# Altium PCB ouch_area.PcbDoc
Units mm, origin at the board's own origin, x right, y up, seen from the top; angles counter-clockwise.
Board outline 240 x 480 mm, 2 copper layers (Top Layer, Bottom Layer); 10 components, 8 nets, 234 pads, 54 vias.
Unrouted connection lines stored in the file: 25.
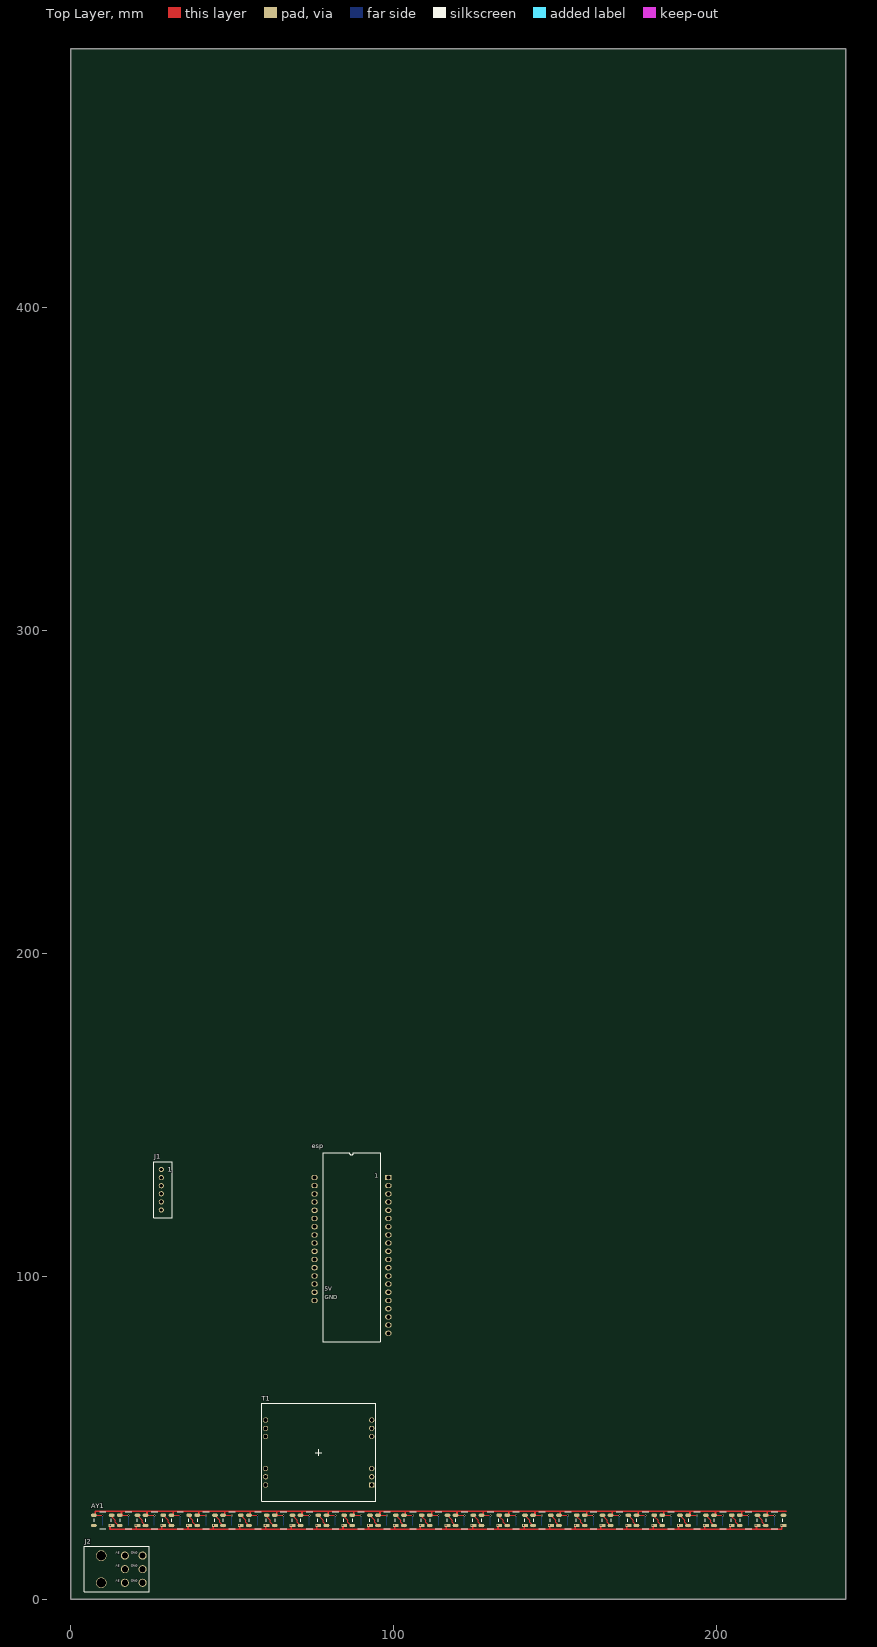
[diagram p0: Top Layer view]
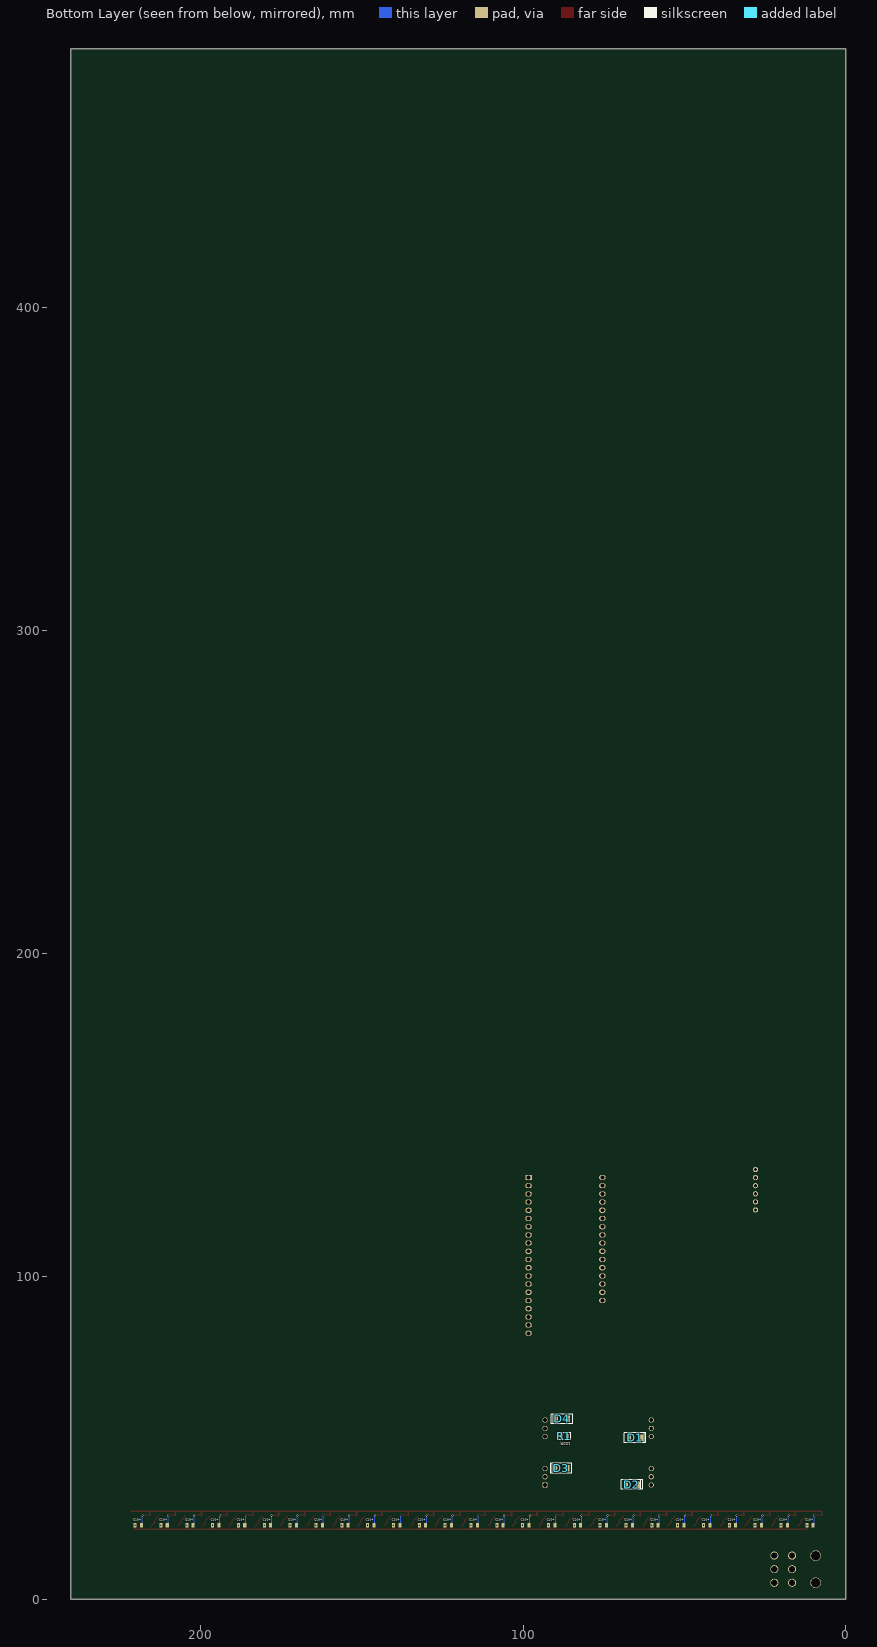
[diagram p1: Bottom Layer view, seen from below]

## Layer stack, top to bottom
Top Solder: solder mask 0.0102, Solder Resist, Dk 3.5
Top Layer: signal copper 0.0356
Dielectric 1: dielectric 0.32, FR-4, Dk 4.8
Bottom Layer: signal copper 0.0356
Bottom Solder: solder mask 0.0102, Solder Resist, Dk 3.5

## Board outline
0,0 240,0 240,480 0,480

## Design rules (kind name [scope] priority, off if disabled: settings)
Clearance [All] p1: gap=0.381 ignorepadtopadclearanceinfootprint=FALSE except(0.127: Arc-THPad Arc-Text Arc-Hole Track-THPad Track-Text Track-Hole SMDPad-SMDPad SMDPad-THPad SMDPad-Via SMDPad-Text SMDPad-Hole THPad-THPad THPad-Via THPad-Text THPad-Hole Via-Via Via-Text Via-Hole Fill-Text Fill-Hole Poly-Text Poly-Hole Region-Text Region-Hole Text-Text Text-Hole; 0.178: Arc-SMDPad Track-SMDPad; 0.229: Arc-Arc Arc-Track Track-Track; 0.254: Arc-Via Track-Via)
HoleSize [All] p1: absolutevalues=TRUE maxlimit=5 minlimit=0.025 maxpercent=80.000 minpercent=20.000
MinimumSolderMaskSliver [All] p1: minsoldermaskwidth=0
PolygonConnect [All] p1: connectstyle=Relief reliefconductorwidth=0.254 reliefentries=4 polygonreliefangle="90 Angle" airgapwidth=0.254
RoutingVias [All] p1: holewidth=0.3 width=0.5 viastyle="Through Hole" minholewidth=0.3 minwidth=0.5 maxholewidth=1.2 maxwidth=2
SilkToSilkClearance [All] p1: silktosilkclearance=0.127
SilkToSolderMaskClearance [IsPad] p1: minsilkscreentomaskgap=0.127 clearancetoexposedcopper=TRUE
SolderMaskExpansion [All] p1: expansion=0.102
Width [All] p1: maxlimit=2.54 minlimit=0.127 preferedwidth=0.254
26 further rules are at their usual default settings.

## Components (designator, comment, footprint, x,y, rotation, side; value= is the part's Value field where it differs from the comment)
AY1 "Ws2812_27leds" 27xWs2812B_withC 217.865,24.384 r180 top
D1 "LL4148" SOD80-LL4148 65.296,49.944 r0 bottom
D2 "LL4148" SOD80-LL4148 66.312,35.466 r0 bottom
D3 "LL4148" SOD80-LL4148 88.156,40.546 r180 bottom
D4 "LL4148" SOD80-LL4148 87.902,55.786 r180 bottom
esp "processor" ESP_32_socket 98.298,130.556 r0 top
J1 "ouch_and_mainboard_connector" "xh2.54 6pin" 28,133 r0 top
J2 "4.2mm_5v_gnd_3x3" 4.2MM_6pin_all_5 16.698,5.062 r180 top
R1 "102R" R0805 87.181,50.452 r0 bottom
T1 "Touch_pads2x2" TOUCHBOARD2X2 76.726,45.372 r180 top

## Footprints (in the part's own frame and the unit in brackets; to place one, negate y for a bottom-side part, rotate by r counter-clockwise, add the part's x,y. Pads: shape width x height; smd on the part's side, far side on the other; paste and mask are expansions set on the pad)
4.2MM_6pin_all_5 [mm]
  round 2.5 hole 1.9: 1(-5.5,0) 2(-5.5,-4.2) 3(-5.5,-8.4) 4(0,-8.4) 5(0,-4.2) 6(0,0)
  round 3.3 hole 3 unplated: 98(7.3,-8.4) 99(7.3,0)
  silkscreen extent -7.5,-11.25 12.5,2.75
27xWs2812B_withC [mm]
  rect 0.95x1.45 smd far side: 1(-0.295,1.524) 1(7.705,1.524) 1(15.705,1.524) 1(23.705,1.524) 1(31.705,1.524) 1(39.705,1.524) 1(47.705,1.524) 1(55.705,1.524) 1(63.705,1.524) 1(71.705,1.524) 1(79.705,1.524) 1(87.705,1.524) 1(95.705,1.524) 1(103.705,1.524) 1(111.705,1.524) 1(119.705,1.524) 1(127.705,1.524) 1(135.705,1.524) 1(143.705,1.524) 1(151.705,1.524) 1(159.705,1.524) 1(167.705,1.524) 1(175.705,1.524) 1(183.705,1.524) 1(191.705,1.524) 1(199.705,1.524) 1(207.705,1.524) 3(-2.245,1.524) 3(5.755,1.524) 3(13.755,1.524) 3(21.755,1.524) 3(29.755,1.524) 3(37.755,1.524) 3(45.755,1.524) 3(53.755,1.524) 3(61.755,1.524) 3(69.755,1.524) 3(77.755,1.524) 3(85.755,1.524) 3(93.755,1.524) 3(101.755,1.524) 3(109.755,1.524) 3(117.755,1.524) 3(125.755,1.524) 3(133.755,1.524) 3(141.755,1.524) 3(149.755,1.524) 3(157.755,1.524) 3(165.755,1.524) 3(173.755,1.524) 3(181.755,1.524) 3(189.755,1.524) 3(197.755,1.524) 3(205.755,1.524)
  oval 1.8x1 smd: 1(2.75,-1.6) 1(10.75,-1.6) 1(18.75,-1.6) 1(26.75,-1.6) 1(34.75,-1.6) 1(42.75,-1.6) 1(50.75,-1.6) 1(58.75,-1.6) 1(66.75,-1.6) 1(74.75,-1.6) 1(82.75,-1.6) 1(90.75,-1.6) 1(98.75,-1.6) 1(106.75,-1.6) 1(114.75,-1.6) 1(122.75,-1.6) 1(130.75,-1.6) 1(138.75,-1.6) 1(146.75,-1.6) 1(154.75,-1.6) 1(162.75,-1.6) 1(170.75,-1.6) 1(178.75,-1.6) 1(186.75,-1.6) 1(194.75,-1.6) 1(202.75,-1.6) 1(210.75,-1.6) 4(-2.75,-1.6) 4(210.75,1.6) 5(2.75,1.6) 5(5.25,-1.6) 5(10.75,1.6) 5(13.25,-1.6) 5(18.75,1.6) 5(21.25,-1.6) 5(26.75,1.6) 5(29.25,-1.6) 5(34.75,1.6) 5(37.25,-1.6) 5(42.75,1.6) 5(45.25,-1.6) 5(50.75,1.6) 5(53.25,-1.6) 5(58.75,1.6) 5(61.25,-1.6) 5(66.75,1.6) 5(69.25,-1.6) 5(74.75,1.6) 5(77.25,-1.6) 5(82.75,1.6) 5(85.25,-1.6) 5(90.75,1.6) 5(93.25,-1.6) 5(98.75,1.6) 5(101.25,-1.6) 5(106.75,1.6) 5(109.25,-1.6) 5(114.75,1.6) 5(117.25,-1.6) 5(122.75,1.6) 5(125.25,-1.6) 5(130.75,1.6) 5(133.25,-1.6) 5(138.75,1.6) 5(141.25,-1.6) 5(146.75,1.6) 5(149.25,-1.6) 5(154.75,1.6) 5(157.25,-1.6) 5(162.75,1.6) 5(165.25,-1.6) 5(170.75,1.6) 5(173.25,-1.6) 5(178.75,1.6) 5(181.25,-1.6) 5(186.75,1.6) 5(189.25,-1.6) 5(194.75,1.6) 5(197.25,-1.6) 5(202.75,1.6) 5(205.25,-1.6)
  rect 1.8x1 smd: 3(-2.75,1.6) 3(5.25,1.6) 3(13.25,1.6) 3(21.25,1.6) 3(29.25,1.6) 3(37.25,1.6) 3(45.25,1.6) 3(53.25,1.6) 3(61.25,1.6) 3(69.25,1.6) 3(77.25,1.6) 3(85.25,1.6) 3(93.25,1.6) 3(101.25,1.6) 3(109.25,1.6) 3(117.25,1.6) 3(125.25,1.6) 3(133.25,1.6) 3(141.25,1.6) 3(149.25,1.6) 3(157.25,1.6) 3(165.25,1.6) 3(173.25,1.6) 3(181.25,1.6) 3(189.25,1.6) 3(197.25,1.6) 3(205.25,1.6)
  Top Layer lines w0.254: 210.54,-1.524 208,-1.524 ; 205.335,-1.27 204.065,0 204.065,0.635 202.795,1.905 ; 202.54,-1.524 200,-1.524 ; 197.08,-1.27 195.81,0 195.81,0.635 194.54,1.905 ; 194.54,-1.524 192,-1.524 ; 188.955,-1.27 187.685,0 187.685,0.635 186.415,1.905 ; 186.54,-1.524 184,-1.524 ; 181.335,-1.27 180.065,0 180.065,0.635 178.795,1.905 ; 178.54,-1.524 176,-1.524 ; 173.08,-1.27 171.81,0 171.81,0.635 170.54,1.905 ; 170.54,-1.524 168,-1.524 ; 164.955,-1.27 163.685,0 163.685,0.635 162.415,1.905 ; 162.54,-1.524 160,-1.524 ; 157.335,-1.27 156.065,0 156.065,0.635 154.795,1.905 ; 154.54,-1.524 152,-1.524 ; 149.08,-1.27 147.81,0 147.81,0.635 146.54,1.905 ; 146.54,-1.524 144,-1.524 ; 140.955,-1.27 139.685,0 139.685,0.635 138.415,1.905 ; 138.54,-1.524 136,-1.524 ; 133.335,-1.27 132.065,0 132.065,0.635 130.795,1.905 ; 130.54,-1.524 128,-1.524 ; 125.08,-1.27 123.81,0 123.81,0.635 122.54,1.905 ; 122.54,-1.524 120,-1.524 ; 116.955,-1.27 115.685,0 115.685,0.635 114.415,1.905 ; 114.54,-1.524 112,-1.524 ; 109.335,-1.27 108.065,0 108.065,0.635 106.795,1.905 ; 106.54,-1.524 104,-1.524 ; 101.08,-1.27 99.81,0 99.81,0.635 98.54,1.905 ; 98.54,-1.524 96,-1.524 ; 92.955,-1.27 91.685,0 91.685,0.635 90.415,1.905 ; 90.54,-1.524 88,-1.524 ; 85.335,-1.27 84.065,0 84.065,0.635 82.795,1.905 ; 82.54,-1.524 80,-1.524 ; 77.08,-1.27 75.81,0 75.81,0.635 74.54,1.905 ; 74.54,-1.524 72,-1.524 ; 68.955,-1.27 67.685,0 67.685,0.635 66.415,1.905 ; 66.54,-1.524 64,-1.524 ; 61.335,-1.27 60.065,0 60.065,0.635 58.795,1.905 ; 58.54,-1.524 56,-1.524 ; 53.08,-1.27 51.81,0 51.81,0.635 50.54,1.905 ; 50.54,-1.524 48,-1.524 ; 44.955,-1.27 43.685,0 43.685,0.635 42.415,1.905 ; 42.54,-1.524 40,-1.524 ; 37.335,-1.27 36.065,0 36.065,0.635 34.795,1.905 ; 34.54,-1.524 32,-1.524 ; 29.08,-1.27 27.81,0 27.81,0.635 26.54,1.905 ; 26.54,-1.524 24,-1.524 ; 20.955,-1.27 19.685,0 19.685,0.635 18.415,1.905 ; 18.54,-1.524 16,-1.524 ; 13.335,-1.27 12.065,0 12.065,0.635 10.795,1.905 ; 10.16,-1.524 8,-1.524 ; 5.08,-1.27 3.81,0 3.81,0.635 2.54,1.905 ; 2.54,-1.524 0,-1.524
  Top Layer lines w0.508: 210.312,-1.524 210.312,-2.794 -3.556,-2.794 ; 205.74,1.524 205.74,2.794 -2.286,2.794 -2.286,1.524 ; 202.184,-1.524 202.184,-2.794 ; 197.612,2.794 197.612,1.524 ; 194.31,-1.524 194.31,-2.794 ; 189.738,2.794 189.738,1.524 ; 186.182,-1.524 186.182,-2.794 ; 181.61,2.794 181.61,1.524 ; 178.308,-1.524 178.308,-2.794 ; 173.736,2.794 173.736,1.524 ; 170.18,-1.524 170.18,-2.794 ; 165.608,2.794 165.608,1.524 ; 162.306,-1.524 162.306,-2.794 ; 157.48,2.794 157.48,1.778 ; 154.178,-1.524 154.178,-2.794 ; 149.606,2.794 149.606,1.524 ; 146.304,-1.524 146.304,-2.794 ; 141.732,2.794 141.732,1.524 ; 138.176,-1.524 138.176,-2.794 ; 133.604,2.794 133.604,1.524 ; 130.302,-1.524 130.302,-2.794 ; 125.73,2.794 125.73,1.524 ; 122.174,-1.524 122.174,-2.794 ; 117.602,2.794 117.602,1.524 ; 114.3,-1.524 114.3,-2.794 ; 109.728,2.794 109.728,1.524 ; 106.172,-1.524 106.172,-2.794 ; 101.6,2.794 101.6,1.778 ; 98.298,-1.524 98.298,-2.54 ; 93.472,2.794 93.472,1.778 ; 90.17,-1.524 90.17,-2.54 ; 85.598,2.794 85.598,1.778 ; 82.296,-1.524 82.296,-2.54 ; 77.47,2.794 77.47,1.778 ; 74.168,-1.524 74.168,-2.794 ; 69.596,2.794 69.596,1.524 ; 66.294,-1.524 66.294,-2.794 ; 61.722,2.794 61.722,1.524 ; 58.166,-1.524 58.166,-2.794 ; 53.848,2.794 53.848,1.778 ; 50.292,-1.524 50.292,-2.794 ; 45.72,2.794 45.72,1.524 ; 42.164,-1.524 42.164,-2.54 ; 37.592,2.794 37.592,2.032 ; 34.29,-1.524 34.29,-2.794 ; 29.718,2.794 29.718,1.524 ; 26.162,-1.524 26.162,-2.794 ; 21.59,2.794 21.59,1.778 ; 18.288,-1.524 18.288,-2.794 ; 13.716,2.794 13.716,1.524 ; 10.16,-1.524 10.16,-2.794 ; 5.588,2.794 5.588,1.778 ; 2.286,-1.524 2.286,-2.794
  Bottom Layer lines w0.254: 208,1.524 208,-1.524 ; 200,1.524 200,-1.524 ; 192,1.524 192,-1.524 ; 184,1.524 184,-1.524 ; 176,1.524 176,-1.524 ; 168,1.524 168,-1.524 ; 160,1.524 160,-1.524 ; 152,1.524 152,-1.524 ; 144,1.524 144,-1.524 ; 136,1.524 136,-1.524 ; 128,1.524 128,-1.524 ; 120,1.524 120,-1.524 ; 112,1.524 112,-1.524 ; 104,1.524 104,-1.524 ; 96,1.524 96,-1.524 ; 88,1.524 88,-1.524 ; 80,1.524 80,-1.524 ; 72,1.524 72,-1.524 ; 64,1.524 64,-1.524 ; 56,1.524 56,-1.524 ; 48,1.524 48,-1.524 ; 40,1.524 40,-1.524 ; 32,1.524 32,-1.524 ; 24,1.524 24,-1.524 ; 16,1.524 16,-1.524 ; 8,1.524 8,-1.524 ; 0,1.524 0,-1.524
  silkscreen extent -2.63,-2.63 210.63,2.63, body extent -2.7,-2.5 210.7,2.5, height 1.5
ESP_32_socket [mm]
  rect 2x1.6 hole 1.2: 1(0,0)
  oval 2x1.6 hole 1.2: 2(0,-2.54) 3(0,-5.08) 4(0,-7.62) 5(0,-10.16) 6(0,-12.7) 7(0,-15.24) 8(0,-17.78) 9(0,-20.32) 10(0,-22.86) 11(0,-25.4) 12(0,-27.94) 13(0,-30.48) 14(0,-33.02) 15(0,-35.56) 16(0,-38.1) 17(0,-40.64) 18(0,-43.18) 19(0,-45.72) 20(0,-48.26) 21(-22.86,0) 22(-22.86,-2.54) 23(-22.86,-5.08) 24(-22.86,-7.62) 25(-22.86,-10.16) 26(-22.86,-12.7) 27(-22.86,-15.24) 28(-22.86,-17.78) 29(-22.86,-20.32) 30(-22.86,-22.86) 31(-22.86,-25.4) 32(-22.86,-27.94) 33(-22.86,-30.48) 34(-22.86,-33.02) 35(-22.86,-35.56) 36(-22.86,-38.1)
  silkscreen extent -20.32,-50.8 -2.54,7.62
R0805 [mm]
  rect 0.95x1.45 smd: 1(-0.975,0) 2(0.975,0)
  silkscreen extent -1.9,-1.1 1.9,1.1, body extent -1,-0.62 1,0.63, height 0.46
SOD80-LL4148 [mm]
  rect 1.25x2 smd: 1(-1.875,0) 2(1.875,0)
  silkscreen extent -3.3,-1.52 3.3,1.52, body extent -1.8,-0.74 1.8,0.76, height 1.5
TOUCHBOARD2X2 [mm]
  rect 1.6x1.6 hole 1.2: 1(-16.43,10.04)
  round 1.6 hole 1.2: 2(-16.43,7.5) 3(-16.43,4.96) 4(-16.43,-4.96) 5(-16.43,-7.5) 6(-16.43,-10.04) 7(16.43,-10.04) 8(16.43,-7.5) 9(16.43,-4.96) 10(16.43,4.96) 11(16.43,7.5) 12(16.43,10.04)
  silkscreen extent -17.7,-15.21 17.7,15.05, body extent -17.63,-15.16 17.77,15.04, height 4.14
"xh2.54 6pin" [mm]
  round 1.6 hole 1: 1(0,0) 2(0,-2.5) 3(0,-5) 4(0,-7.5) 5(0,-10) 6(0,-12.5)
  silkscreen extent -2.35,-14.95 3.4,2.45, body extent -2.38,-14.95 3.38,2.45, height 7

## Part data
D1 D2 D3 D4: "ON SEMICONDUCTOR - LL4148 - Small Signal Diode, Single, 100 V, 200 mA, 1 V, 4 ns, 2 A", Average Rectified Current=200mA, Forward Voltage=1V, Manufacturer 1="ON Semiconductor / Fairchild", Max Forward Surge Current (Ifsm)=2A, Max Operating Temperature=175°C, Max Repetitive Reverse Voltage (Vrrm)=100V, Max Reverse Current=25nA, Min Operating Temperature=-65°C, Package Quantity=2500, Power Dissipation=500mW, Supplier Part Number 1=LL4148FSCT-ND, Category="Rectifier Diodes", ComponentLink1Description=https://datasheet.ciiva.com/1181/1730036-1181026.pdf?src-supplier=Element14, ComponentLink1URL=https://datasheet.ciiva.com/1181/1730036-1181026.pdf?src-supplier=Element14, ComponentLink2Description=https://datasheet.ciiva.com/8303/ll4148-8303779.pdf?src-supplier=Avnet, ComponentLink2URL=https://datasheet.ciiva.com/8303/ll4148-8303779.pdf?src-supplier=Avnet, ComponentLink3Description=https://datasheet.ciiva.com/27048/94908-27048041.pdf?src-supplier=Jameco, ComponentLink3URL=https://datasheet.ciiva.com/27048/94908-27048041.pdf?src-supplier=Jameco, ComponentLink4Description=https://datasheet.ciiva.com/4453/ll4148-70504-4453114.pdf?src-supplier=Mouser, ComponentLink4URL=https://datasheet.ciiva.com/4453/ll4148-70504-4453114.pdf?src-supplier=Mouser, ComponentLink5Description=https://datasheet.ciiva.com/910/ll4148-910343.pdf?src-supplier=Digi-Key, ComponentLink5URL=https://datasheet.ciiva.com/910/ll4148-910343.pdf?src-supplier=Digi-Key, ComponentLink6Description=https://datasheet.ciiva.com/910/ll4148-910344.pdf?src-supplier=Digi-Key, ComponentLink6URL=https://datasheet.ciiva.com/910/ll4148-910344.pdf?src-supplier=Digi-Key, ComponentLink7Description=https://datasheet.ciiva.com/910/ll4148-910345.pdf?src-supplier=Digi-Key, ComponentLink7URL=https://datasheet.ciiva.com/910/ll4148-910345.pdf?src-supplier=Digi-Key, ComponentLink8Description=https://datasheet.ciiva.com/22735/1896420-22735578.pdf?src-supplier=Element14, ComponentLink8URL=https://datasheet.ciiva.com/22735/1896420-22735578.pdf?src-supplier=Element14, ComponentLink9Description=https://datasheet.ciiva.com/26912/getdatasheetpartid-110057-26912779.pdf?src-supplier=Verical, ComponentLink9URL=https://datasheet.ciiva.com/26912/getdatasheetpartid-110057-26912779.pdf?src-supplier=Verical, ComponentLink10Description=https://datasheet.ciiva.com/8053/1896420-8053645.pdf?src-supplier=Element14, ComponentLink10URL=https://datasheet.ciiva.com/8053/1896420-8053645.pdf?src-supplier=Element14, Contact Plating=Tin,Matte, Element Configuration=Single, Forward Current=200mA, Height=1.5mm, Lead Free="Lead Free", Length=3.6mm, Manufacturer Part Number 1=LL4148, Max Reverse Voltage (DC)=100V, Max Surge Current=2A, Mount="Surface Mount", Number of Pins=2, Packaging="Tape and Reel", Peak Non-Repetitive Surge Current=2A, Pricing 1="1=0.10000, 10=0.08400, 100=0.03220, 500=0.02346, 1000=0.01575 (USD)", Radiation Hardening=No, REACH SVHC="No SVHC", Recovery Time=4ns, Reverse Recovery Time=4ns, Reverse Voltage=100V, RoHS=Yes, Stock 1=428902, Supplier 1=Digi-Key, Voltage=100V, Weight=0.01lb, Width=1.5mm
esp: library part ESP_32_lolin
R1: library part resistor(CRCW0805360RFKEA, "Res Thick Film 0805 360 Ohm 1% 0.125W(1/8W) ±100ppm/C Molded SMD Automotive Paper T/R", Case/Package=0805, Case Code (Metric)=2012, Manufacturer 1=Vishay, Manufacturer Part Number 1=CRCW0805360RFKEA, Max Operating Temperature=155°C, Max Power Dissipation=125mW, Min Operating Temperature=-55°C, Package Quantity=10, Resistance=360R, Supplier Part Number 1=541-360CCT-ND, Temperature Coefficient=100ppm/°C, Tolerance=1%, Voltage Rating=150V, Case Code (Imperial)=0805, Category="Chip SMD Resistors", ComponentLink1Description=https://datasheet.ciiva.com/2467/dcrcwe3-2467773.pdf?src-supplier=Digi-Key, ComponentLink1URL=https://datasheet.ciiva.com/2467/dcrcwe3-2467773.pdf?src-supplier=Digi-Key, Composition="Thick Film", Contact Plating=Tin, Depth=1.25mm, Features="Automotive AEC-Q200", Height=0.45mm, Lead Free="Lead Free", Length=2mm, Military Standard=Not, Number of Pins=2, Number of Terminals=2, Number of Terminations=2, Packaging="Tape and Reel", Power Rating=125mW, Pricing 1="1=0.10000, 10=0.06000, 100=0.02450, 1000=0.01102, 2500=0.00957 (USD)", Radiation Hardening=No, REACH SVHC=Unknown, RoHS=Yes, Stock 1=25005, Supplier 1=Digi-Key, Termination=SMD/SMT, Voltage Rating (DC)=150V, Weight=0.000194oz, Width=0.049inch

## Via types
v1: diameter 0.6, hole 0.4, Top Layer to Bottom Layer, 54 vias

## Nets (pads, with @x,y where several pads share a name; then routed paths per layer and width w, separated by ;. In a path a pad name is that pad's centre, name@x,y a point inside that pad or via, vN(x,y) a via of type N, cw(c..) or ccw(c..) an arc to the next point about the centre after c; other vN are vias at no path point)
+5V: AY1.1 J2.4 J2.5 J2.6 R1.2 T1.1 T1.4 T1.7 T1.10
  other v1: 9.865,25.908 17.865,25.908 25.865,25.908 33.865,25.908 41.865,25.908 49.865,25.908 57.865,25.908 65.865,25.908 73.865,25.908 81.865,25.908 89.865,25.908 97.865,25.908 105.865,25.908 113.865,25.908 121.865,25.908 129.865,25.908 137.865,25.908 145.865,25.908 153.865,25.908 161.865,25.908 169.865,25.908 177.865,25.908 185.865,25.908 193.865,25.908 201.865,25.908 209.865,25.908 217.865,25.908
GND: AY1.3 J2.1 J2.2 J2.3 T1.2 T1.5 T1.8 T1.11
  other v1: 12.151,22.86 20.151,22.86 28.151,22.86 36.151,22.86 44.151,22.86 52.151,22.86 60.151,22.86 68.151,22.86 76.151,22.86 84.151,22.86 92.151,22.86 100.151,22.86 108.151,22.86 116.151,22.86 124.151,22.86 132.151,22.86 140.151,22.86 148.151,22.86 156.151,22.86 164.151,22.86 172.151,22.86 180.151,22.86 188.151,22.86 196.151,22.86 204.151,22.86 212.151,22.86 220.151,22.86
Neopixel_DIN: AY1.4 esp.31
NetD1_1: D1.1 T1.9
NetD2_1: D2.1 T1.12
NetD3_1: D3.1 T1.3
NetD4_1: D4.1 T1.6
Touch_1: D1.2 D2.2 D3.2 D4.2 R1.1
pads on no net: AY1.5 esp.1 esp.2 esp.3 esp.4 esp.5 esp.6 esp.7 esp.8 esp.9 esp.10 esp.11 esp.12 esp.13 esp.14 esp.15 esp.16 esp.17 esp.18 esp.19 esp.20 esp.21 esp.22 esp.23 esp.24 esp.25 esp.26 esp.27 esp.28 esp.29 esp.30 esp.32 esp.33 esp.34 esp.35 esp.36 J1.1 J1.2 J1.3 J1.4 J1.5 J1.6 J2.98 J2.99

## Text inside footprints (layer, text, board x,y; h text height)
AY1: Bottom Overlay "C104" at 204.659,23.876 h1.2; Bottom Overlay "C104" at 212.659,23.876 h1.2; Bottom Overlay "C104" at 220.659,23.876 h1.2; Bottom Overlay "C104" at 196.659,23.876 h1.2; Bottom Overlay "C104" at 188.659,23.876 h1.2; Bottom Overlay "C104" at 180.659,23.876 h1.2; Bottom Overlay "C104" at 172.659,23.876 h1.2; Bottom Overlay "C104" at 164.659,23.876 h1.2; Bottom Overlay "C104" at 156.659,23.876 h1.2; Bottom Overlay "C104" at 148.659,23.876 h1.2; Bottom Overlay "C104" at 140.659,23.876 h1.2; Bottom Overlay "C104" at 132.659,23.876 h1.2; Bottom Overlay "C104" at 124.659,23.876 h1.2; Bottom Overlay "C104" at 116.659,23.876 h1.2; Bottom Overlay "C104" at 108.659,23.876 h1.2; Bottom Overlay "C104" at 100.659,23.876 h1.2; Bottom Overlay "C104" at 92.659,23.876 h1.2; Bottom Overlay "C104" at 84.659,23.876 h1.2; Bottom Overlay "C104" at 76.659,23.876 h1.2; Bottom Overlay "C104" at 68.659,23.876 h1.2; Bottom Overlay "C104" at 60.659,23.876 h1.2; Bottom Overlay "C104" at 52.659,23.876 h1.2; Bottom Overlay "C104" at 44.659,23.876 h1.2; Bottom Overlay "C104" at 36.659,23.876 h1.2; Bottom Overlay "C104" at 28.659,23.876 h1.2; Bottom Overlay "C104" at 20.659,23.876 h1.2; Bottom Overlay "C104" at 12.659,23.876 h1.2
esp: Top Overlay "1" at 94.048,130.056 h2.03; Top Overlay "5V" at 78.548,95.056 h2.03; Top Overlay "GND" at 78.548,92.306 h2.03
J1: Top Overlay "1" at 30,132.25 h1.52
J2: Top Overlay "GND" at 20.762,6.332 h1.2 r180; Top Overlay "GND" at 20.762,10.904 h1.2 r180; Top Overlay "GND" at 20.762,14.968 h1.2 r180; Top Overlay "5V" at 15.174,10.904 h1.2 r180; Top Overlay "5V" at 15.174,14.968 h1.2 r180; Top Overlay "5V" at 15.174,6.332 h1.2 r180